# Altium PCB SpeakerAmpPCB.PcbDoc
Units mm, origin at the board's own origin, x right, y up, seen from the top; angles counter-clockwise.
Board outline 85 x 58.5 mm, 2 copper layers (Top Layer, Bottom Layer); 17 components, 13 nets, 41 pads, 8 vias.
Unrouted connection lines stored in the file: 8.
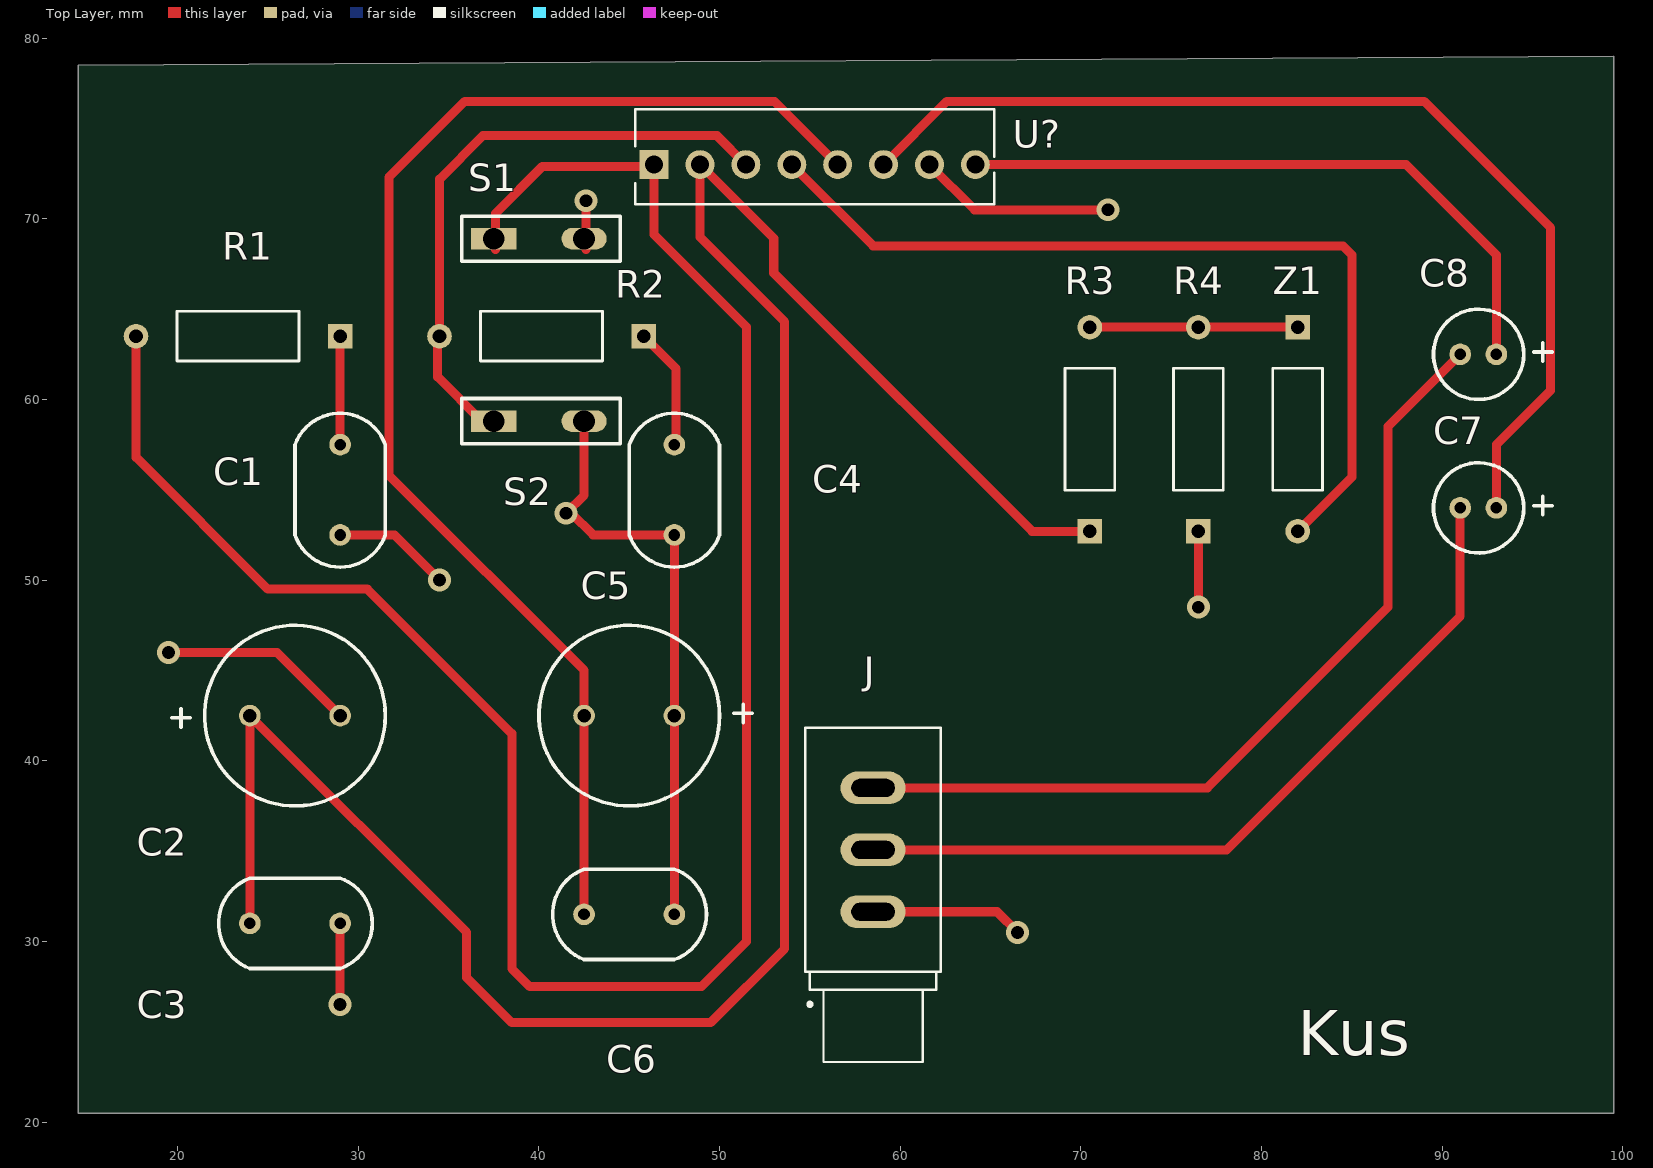
[diagram p0: Top Layer view]
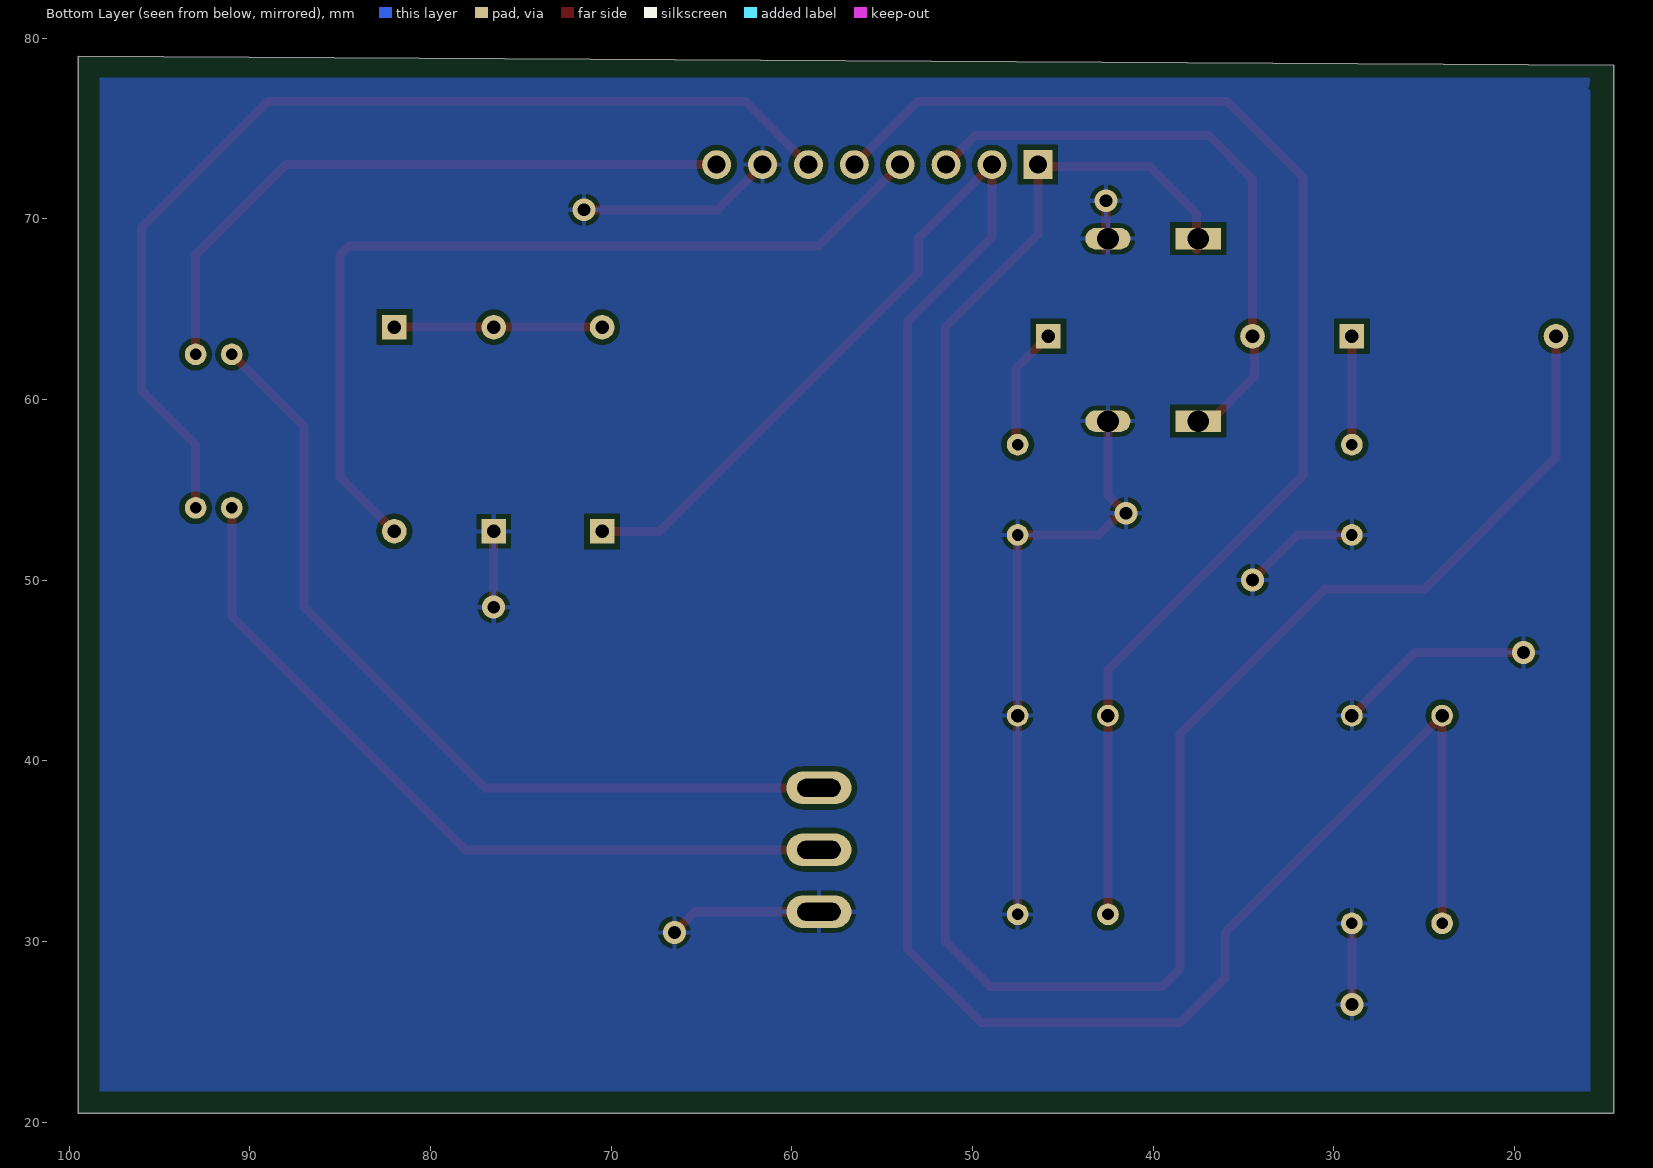
[diagram p1: Bottom Layer view, seen from below]
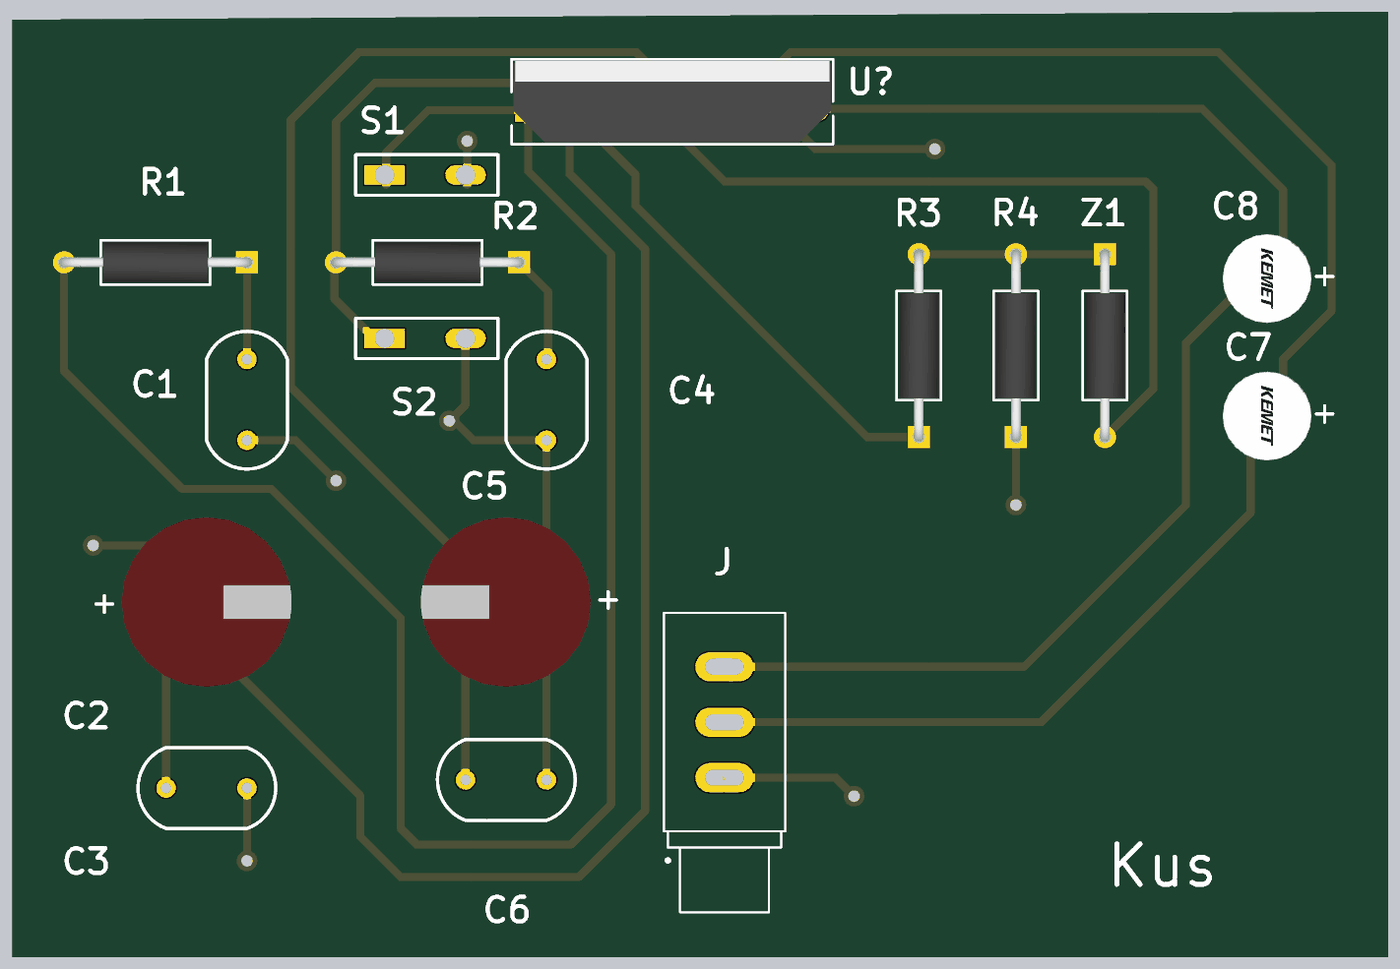
[diagram p2: 3D render of the assembled board from above, using the file's embedded part models]

## Layer stack, top to bottom
Top Solder: solder mask 0.0102, Solder Resist, Dk 3.5
Top Layer: signal copper 0.0356
Dielectric 1: dielectric 0.32, FR-4, Dk 4.8
Bottom Layer: signal copper 0.0356
Bottom Solder: solder mask 0.0102, Solder Resist, Dk 3.5

## Board outline
14.5,78.5 14.5,20.5 99.5,20.5 99.5,79

## Design rules (kind name [scope] priority, off if disabled: settings)
Clearance [All] p1: gap=0.3 ignorepadtopadclearanceinfootprint=FALSE
PolygonConnect [All] p1: connectstyle=Relief reliefconductorwidth=0.254 reliefentries=4 polygonreliefangle="90 Angle" airgapwidth=0.254
RoutingVias [All] p1: holewidth=0.3 width=0.6 viastyle="Through Hole" minholewidth=0.3 minwidth=0.6 maxholewidth=0.3 maxwidth=0.6
SolderMaskExpansion [All] p1: expansion=0.102 istentingtop=FALSE
Width [All] p1: maxlimit=1 minlimit=0.3 preferedwidth=0.5
30 further rules are at their usual default settings.

## Components (designator, comment, footprint, x,y, rotation, side; value= is the part's Value field where it differs from the comment)
C1 "0.1uF" 0.1UFC 29,52.5 r90 top
C2 "1000uF" 1000UFC 29,42.5 r180 top
C3 "0.1uF" 0.1UFC 29,31 r180 top
C4 "0.1uF" 0.1UFC 47.5,52.5 r90 top
C5 "1000uF" 1000UFC 42.5,42.5 r0 top
C6 "0.1uF" 0.1UFC 47.5,31.5 r180 top
C7 "1uF" 1UFC 91,54 r0 top
C8 "1uF" 1UFC 91,62.5 r0 top
J "MJ-3502N" CUI_MJ-3502N 58.5,35.071 r90 top
R1 "4.7" MBB_VIS 29,63.5 r180 top
R2 "4.7" MBB_VIS 45.8,63.5 r180 top
R3 "4.7K" MBB_VIS 70.5,52.7 r90 top
R4 "4.7K" MBB_VIS 76.5,52.7 r90 top
S1 "SPEAKER" CONNECTION 37.5,68.9 r0 top
S2 "SPEAKER" CONNECTION 37.5,58.8 r0 top
U? "IC" Multiwatt8_STM 46.38,73 r0 top
Z1 "5.1V" MBB_VIS 82,64 r270 top

## Footprints (in the part's own frame and the unit in brackets; to place one, negate y for a bottom-side part, rotate by r counter-clockwise, add the part's x,y. Pads: shape width x height; smd on the part's side, far side on the other; paste and mask are expansions set on the pad)
0.1UFC [mm]
  round 1.2 hole 0.65: 1(0,0) 2(5,0)
  silkscreen extent -1.78,-2.5 6.73,2.5
1UFC [mm]
  round 1.2 hole 0.65: 1(0,0) 2(2,0)
  silkscreen extent -1.48,-2.5 5.08,2.5, body extent -1.73,-2.76 3.77,2.75, height 12.52
1000UFC [mm]
  round 1.2 hole 0.75: 1(0,0) 2(5,0)
  silkscreen extent -2.5,-5 9.32,5, body extent -2.75,-5.24 7.75,5.25, height 22.01
CONNECTION [mm]
  rect 2.5x1.2 hole 1.2: 1(0,0)
  oval 2.5x1.2 hole 1.2: 2(5,0)
  silkscreen extent -1.78,-1.25 7,1.25
CUI_MJ-3502N [mm]
  oval 1.8x3.6 hole 1 slot 2.4 at 90 deg: 1(-3.429,0) 2(0,0) 3(3.429,0)
  silkscreen extent -11.75,-3.75 6.75,3.75
MBB_VIS [mm]
  rect 1.362x1.362 hole 0.75 mask+0: 1(0,0)
  round 1.362 hole 0.75 mask+0: 2(11.3,0)
  silkscreen extent 2.27,-1.38 9.03,1.38, body extent -0.3,-1.25 11.6,1.25, height 2.49
Multiwatt8_STM [mil]
  rect 63x63 hole 39.37: 1(0,0)
  round 63 hole 39.37: 2(100,0) 3(200,0) 4(300,0) 5(400,0) 6(500,0) 7(600,0) 8(700,0)
  silkscreen extent -41,-86 741,120, body extent -36,-81 736,116, height 797

## Part data
C1 C3 C4 C6: library part FA26C0G2A104JRU06, "Cap Ceramic 0.1uF 100V C0G 5% Radial 5mm 125°C Automotive Ammo", Manufacturer=TDK, Supplier Part Number 1=445-175399-1-ND, Manufacturer Part Number=FA26C0G2A104JRU06, Pricing 1="1=1.20000, 10=0.94500, 50=0.81900, 100=0.70880, 500=0.53550, 1000=0.47250 (USD)", RoHS=No, Stock 1=3509, Supplier 1=Digi-Key
C2 C5: library part UFW1E102MPD, "CAP ALUM 1000UF 20% 25V RADIAL", Capacitance=1mF, Case/Package=Radial, Leakage Current=750uA, Manufacturer=Nichicon, Max Operating Temperature=85°C, Min Operating Temperature=-40°C, Package Quantity=200, Ripple Current=950mA, Supplier Part Number 1=493-15126-ND, Tolerance=20%, Voltage Rating=25V, Category="Aluminum Electrolytic Capacitors", ComponentLink1Description=https://datasheet.ciiva.com/113/e-fw-113781.pdf?src-supplier=Digi-Key, ComponentLink1URL=https://datasheet.ciiva.com/113/e-fw-113781.pdf?src-supplier=Digi-Key, Dissipation Factor=0.16%, Height - Seated (Max)=0.787inch, Lead Pitch=0.197inch, Length=20mm, Life (Hours)=2000Hour, Manufacturer Part Number=UFW1E102MPD, Mount="Through Hole", Packaging=Bulk, Pricing 1="1=0.65000, 10=0.48200, 50=0.38580, 100=0.33060, 500=0.26174, 1000=0.22042, 2500=0.20664, 5000=0.19286 (USD)", RoHS=Yes, Stock 1=1288, Supplier 1=Digi-Key, Termination=Radial, Voltage Rating (DC)=25V
C7 C8: library part ESK105M050AC3AA, "Cap Aluminum 1uF 50V 20% (5 X 11mm) Radial Aluminum Cylindrical Can 2mm 10mA 2000 hr 85°C Bulk", Case/Package=Radial, Manufacturer=KEMET, Max Operating Temperature=85°C, Min Operating Temperature=-40°C, Package Quantity=10000, Ripple Current=10mA, Supplier Part Number 1=399-6596-ND, Tolerance=20%, Voltage Rating=50V, Capacitance=1uF, Category="Aluminum Electrolytic Capacitors", ComponentLink1Description=https://datasheet.ciiva.com/22627/1500292-22627197.pdf?src-supplier=Farnell, ComponentLink1URL=https://datasheet.ciiva.com/22627/1500292-22627197.pdf?src-supplier=Farnell, ComponentLink2Description=https://datasheet.ciiva.com/22621/1500292-22621006.pdf?src-supplier=Element14, ComponentLink2URL=https://datasheet.ciiva.com/22621/1500292-22621006.pdf?src-supplier=Element14, Diameter=5mm, Dissipation Factor=10%, Height=11mm, Height - Seated (Max)=0.492inch, Lead Pitch=2mm, Length=11mm, Life (Hours)=2000Hour, Manufacturer Part Number=ESK105M050AC3AA, Mount="Through Hole", Packaging=Bulk, Polarity=Polar, Pricing 1="1=0.17000, 10=0.12000, 25=0.08800, 50=0.06840, 100=0.05660, 250=0.04688, 500=0.03972, 750=0.03580, 4000=0.02799 (USD)", Radiation Hardening=No, REACH SVHC="No SVHC", RoHS=Yes, Stock 1=84758, Supplier 1=Digi-Key, Termination=Radial, Voltage Rating (DC)=50V
J: "3.5 mm, Mono, Right Angle, Through Hole, Audio Jack Connector", Package=None, Availability=Unavailable, CUI_purchase_URL=https://www.cuidevices.com/product/interconnect/connectors/audio-connectors/jacks/mj-3502n?utm_source=snapeda.com&utm_medium=referral&utm_campaign=snapedaBOM, MF="CUI Devices", MP=MJ-3502N, Price=None, SnapEDA_Link=https://www.snapeda.com/parts/MJ-3502N/CUI%20Devices/view-part/576115/?ref=snap
R1 R2: library part MBB02070C4708FRP00, "RES 4.7 OHM 0.6W 1% AXIAL", Case/Package=Axial, Manufacturer="Vishay BCcomponents", Max Operating Temperature=155°C, Max Power Dissipation=600mW, Min Operating Temperature=-55°C, Package Quantity=1, Resistance=4.7R, Resistor Type="Thin Film", Supplier Part Number 1=BC4.70ZCT-ND, Temperature Coefficient=50ppm/°C, Tolerance=1%, Category="Through-Hole Resistors", ComponentLink1Description=https://datasheet.ciiva.com/2711/mbxsma-2711529.pdf?src-supplier=Digi-Key, ComponentLink1URL=https://datasheet.ciiva.com/2711/mbxsma-2711529.pdf?src-supplier=Digi-Key, ComponentLink2Description=https://datasheet.ciiva.com/2711/mbxsma-2711530.pdf?src-supplier=Digi-Key, ComponentLink2URL=https://datasheet.ciiva.com/2711/mbxsma-2711530.pdf?src-supplier=Digi-Key, Contact Plating=Tin, Diameter=2.5mm, Lead Free="Lead Free", Length=0.256inch, Manufacturer Part Number=MBB02070C4708FRP00, Mount="Through Hole", Number of Terminations=2, Packaging="Tape and Reel", Pricing 1="1=0.29000, 10=0.24200, 100=0.09460, 1000=0.03960, 2500=0.03630 (USD)", Radiation Hardening=No, RoHS=Yes, Stock 1=7417, Supplier 1=Digi-Key
R3 R4: library part FMP200JR-52-4K7, "RES 4.7K OHM 2W 5% AXIAL", Case/Package=Axial, Manufacturer=Yageo, Max Operating Temperature=155°C, Max Power Dissipation=2W, Min Operating Temperature=-55°C, Package Quantity=1, Resistance=4.7kR, Resistor Type="Metal Film", Supplier Part Number 1=4.7KZCT-ND, Tolerance=5%, Category="Through-Hole Resistors", ComponentLink1Description=https://datasheet.ciiva.com/2710/yageolr-fmp-2013-2710730.pdf?src-supplier=Digi-Key, ComponentLink1URL=https://datasheet.ciiva.com/2710/yageolr-fmp-2013-2710730.pdf?src-supplier=Digi-Key, ComponentLink2Description=https://datasheet.ciiva.com/2710/yageolr-fmp-2013-2710731.pdf?src-supplier=Digi-Key, ComponentLink2URL=https://datasheet.ciiva.com/2710/yageolr-fmp-2013-2710731.pdf?src-supplier=Digi-Key, Lead Free="Lead Free", Length=0.354inch, Manufacturer Part Number=FMP200JR-52-4K7, Number of Terminations=2, Packaging="Tape and Reel", Pricing 1="1=0.31000, 10=0.26000, 25=0.18920, 50=0.13720, 100=0.10170, 250=0.07800, 500=0.06146, 1000=0.04255 (USD)", RoHS=Yes, Stock 1=609, Supplier 1=Digi-Key
U?: library part TDA7264, "Audio Amplifiers 25W Stereo Amplifier", Dual Supply Voltage=18V, Manufacturer=STMicroelectronics, Max Dual Supply Voltage=22.5V, Max Operating Temperature=150°C, Max Output Power=25W, Max Power Dissipation=30W, Min Dual Supply Voltage=5V, Min Operating Temperature=-40°C, Nominal Supply Current=4.5A, Package Quantity=25, Power Supply Rejection Ratio (PSRR)=60dB, Quiescent Current=80mA, Supplier Part Number 1=497-3959-5-ND, Voltage Gain=30dB, Category="Amplifiers - Audio", ComponentLink1Description=https://datasheet.ciiva.com/17307/cd00000144-17307846.pdf?src-supplier=Avnet+Europe, ComponentLink1URL=https://datasheet.ciiva.com/17307/cd00000144-17307846.pdf?src-supplier=Avnet+Europe, ComponentLink2Description=https://datasheet.ciiva.com/16367/cd00000144-16367064.pdf?src-supplier=Future+Electronics, ComponentLink2URL=https://datasheet.ciiva.com/16367/cd00000144-16367064.pdf?src-supplier=Future+Electronics, ComponentLink3Description=https://datasheet.ciiva.com/4767/cd00000144-102330-4767503.pdf?src-supplier=Mouser, ComponentLink3URL=https://datasheet.ciiva.com/4767/cd00000144-102330-4767503.pdf?src-supplier=Mouser, ComponentLink4Description=https://datasheet.ciiva.com/26842/tda7264-26842670.pdf?src-supplier=IIIC, ComponentLink4URL=https://datasheet.ciiva.com/26842/tda7264-26842670.pdf?src-supplier=IIIC, ComponentLink5Description=https://datasheet.ciiva.com/1481/1690491-1481771.pdf?src-supplier=Element14, ComponentLink5URL=https://datasheet.ciiva.com/1481/1690491-1481771.pdf?src-supplier=Element14, Gain=30dB, Height=10.7mm, Lead Free="Lead Free", Length=19.6mm, Load Impedance=8R, Manufacturer Part Number=TDA7264, Max Supply Voltage=22.5V, Mount="Through Hole", Number of Channels=2, Number of Pins=8, Output Power=25W, Packaging=Rail/Tube, Power Dissipation=30W, Pricing 1="1=3.89000, 10=3.49600, 25=3.30520, 100=2.71770, 250=2.43856, 500=2.35040, 1000=1.95377, 2500=1.88032, 5000=1.82156 (USD)", Radiation Hardening=No, REACH SVHC="No SVHC", RoHS=Yes, Stock 1=535, Supplier 1=Digi-Key, Supply Type=Dual, Width=5mm
Z1: library part BZX55C5V1-TAP, "Vishay BZX55C5V1-TAP Zener Diode, 5.1V 6% 0.5 W Through Hole 2-Pin DO-35", Breakdown Voltage=5.4V, Manufacturer=Vishay, Max Operating Temperature=175°C, Max Power Dissipation=500mW, Max Reverse Leakage Current=100nA, Min Operating Temperature=-65°C, Package Quantity=30000, Supplier Part Number 1=BZX55C5V1-TAPGICT-ND, Test Current=5mA, Voltage Tolerance=6%, Category="Zener Diodes", ComponentLink1Description=https://datasheet.ciiva.com/15142/getdatasheetpartid-84692-15142491.pdf?src-supplier=Verical, ComponentLink1URL=https://datasheet.ciiva.com/15142/getdatasheetpartid-84692-15142491.pdf?src-supplier=Verical, ComponentLink2Description=https://datasheet.ciiva.com/10634/bzx55-se-10634312.pdf?src-supplier=Avnet, ComponentLink2URL=https://datasheet.ciiva.com/10634/bzx55-se-10634312.pdf?src-supplier=Avnet, Contact Plating=Tin,Silver, Diameter=1.7mm, Element Configuration=Single, ESD Protection=No, Impedance=100R, Lead Free="Lead Free", Length=3.9mm, Manufacturer Part Number=BZX55C5V1-TAP, Mount="Through Hole", Number of Pins=2, Packaging="Ammo Pack", Power Dissipation=500mW, Pricing 1="1=0.19000, 10=0.13200, 100=0.07150, 500=0.05616, 1000=0.03900, 2000=0.03231, 5000=0.03055 (USD)", Radiation Hardening=No, REACH SVHC=Unknown, RoHS=Yes, Stock 1=15308, Supplier 1=Digi-Key, Zener Voltage=5.1V

## Via types
v1: diameter 1.27, hole 0.711, Top Layer to Bottom Layer, tented both sides, 8 vias

## Nets (pads, with @x,y where several pads share a name; then routed paths per layer and width w, separated by ;. In a path a pad name is that pad's centre, name@x,y a point inside that pad or via, vN(x,y) a via of type N, cw(c..) or ccw(c..) an arc to the next point about the centre after c; other vN are vias at no path point)
+12V: C2.2 C3.2 R3.1 U?.2 | length 127.8
  Top Layer w0.5: C3.2 C2.2 36,30.5 36,28 38.5,25.5 49.5,25.5 53.6,29.6 53.6,64.3 48.92,68.98 U?.2 53,68.92 53,67 67.3,52.7 R3.1
-12V: C5.1 C6.2 U?.5 | length 73.3
  Top Layer w0.5: C6.2 C5.1 42.5,45 31.7,55.8 31.7,72.3 35.9,76.5 53.04,76.5 U?.5
IN1: C8.1 J.3 | length 48.3
  Top Layer w0.5: J.3 77,38.5 87,48.5 87,58.5 C8.1
IN2: C7.1 J.2 | length 43.9
  Top Layer w0.5: J.2 78.071,35.071 91,48 C7.1
MUTE/ST-BY: U?.4 Z1.2 | length 49.6
  Top Layer w0.5: U?.4 58.5,68.5 84.5,68.5 85,68 85,55.7 Z1.2
NetC1_2: C1.2 R1.1 | length 6
  Top Layer w0.5: C1.2 R1.1
NetC4_2: C4.2 R2.1 | length 6.8
  Top Layer w0.5: R2.1 47.6,61.7 47.6,57.6 C4.2
NetC7_2: C7.2 U?.6 | length 58
  Top Layer w0.5: U?.6 62.58,76.5 89,76.5 96,69.5 96,60.5 93,57.5 C7.2
NetC8_2: C8.2 U?.8 | length 36.4
  Top Layer w0.5: U?.8 88,73 93,68 C8.2
NetR3_2: R3.2 R4.2 Z1.1 | length 11.5
  Top Layer w0.5: R3.2 R4.2 Z1.1
OUT1: R1.2 S1.1 U?.1 | length 118.3
  Top Layer w0.5: R1.2 17.7,56.8 25,49.5 30.5,49.5 38.5,41.5 38.5,28.5 39.5,27.5 49,27.5 51.5,30 51.5,64 46.38,69.12 U?.1 46.28,72.9 40.2,72.9 37.6,70.3 37.6,68.9 S1.1@37.6,68.3
OUT2: R2.2 S2.1 U?.3 | length 33.7
  Top Layer w0.5: S2.1 36.85,58.8 34.4,61.25 34.4,63.4 R2.2 34.5,72.2 36.9,74.6 49.86,74.6 U?.3
PG: C1.1 C2.1 C3.1 C4.1 C5.2 C6.1 J.1 R4.1 S1.2 S2.2 U?.7 | length 81
  Top Layer w0.5: v1(19.5,46) 25.5,46 C2.1 ; v1(29,26.5) C3.1 ; C1.1 32,52.5 v1(34.5,50) ; S2.2 42.5,54.7 v1(41.5,53.7) 41.8,53.7 43,52.5 C4.1 C5.2 C6.1 ; S1.2@42.6,68.3 v1@42.6,70.7 ; J.1 65.358,31.642 v1(66.5,30.5) ; U?.7 64.12,70.5 v1(71.5,70.5) ; v1(76.5,48.5) R4.1
  other v1: 42.6,71

## Polygon pours and split planes (outlines as drawn)
PG on Bottom Layer "PG_L02_P000" (solid, pour order 0): 15.9,77.2 15.8,77.1 15.8,21.7 98.3,21.7 98.3,77.8 15.8,77.8

## Silkscreen, mask and mechanical layers (free items; w line width, h text height)
Top Overlay:
  text "Kus" at 82,23.7 h2.5